# Altium PCB HEART.PcbDoc
Units mm, origin at the board's own origin, x right, y up, seen from the top; angles counter-clockwise.
Board outline 31.12 x 57.15 mm, 2 copper layers (Top Layer, Bottom Layer); 27 components, 16 nets, 63 pads, 3 vias.
Unrouted connection lines stored in the file: 13.
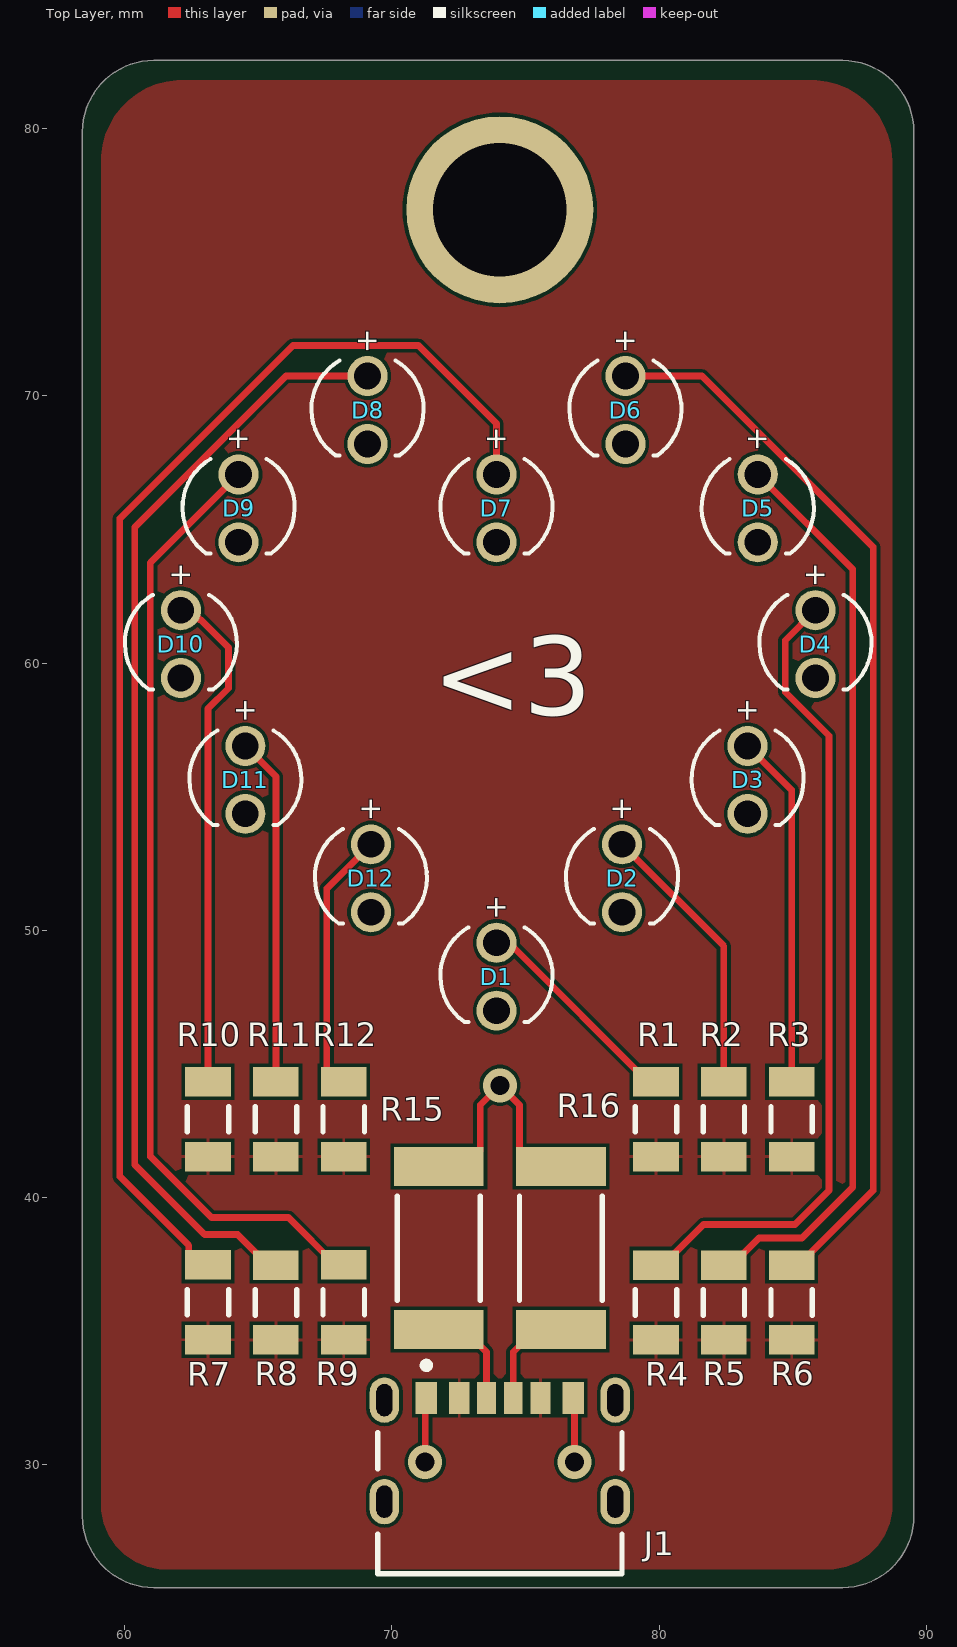
[diagram p0: Top Layer view]
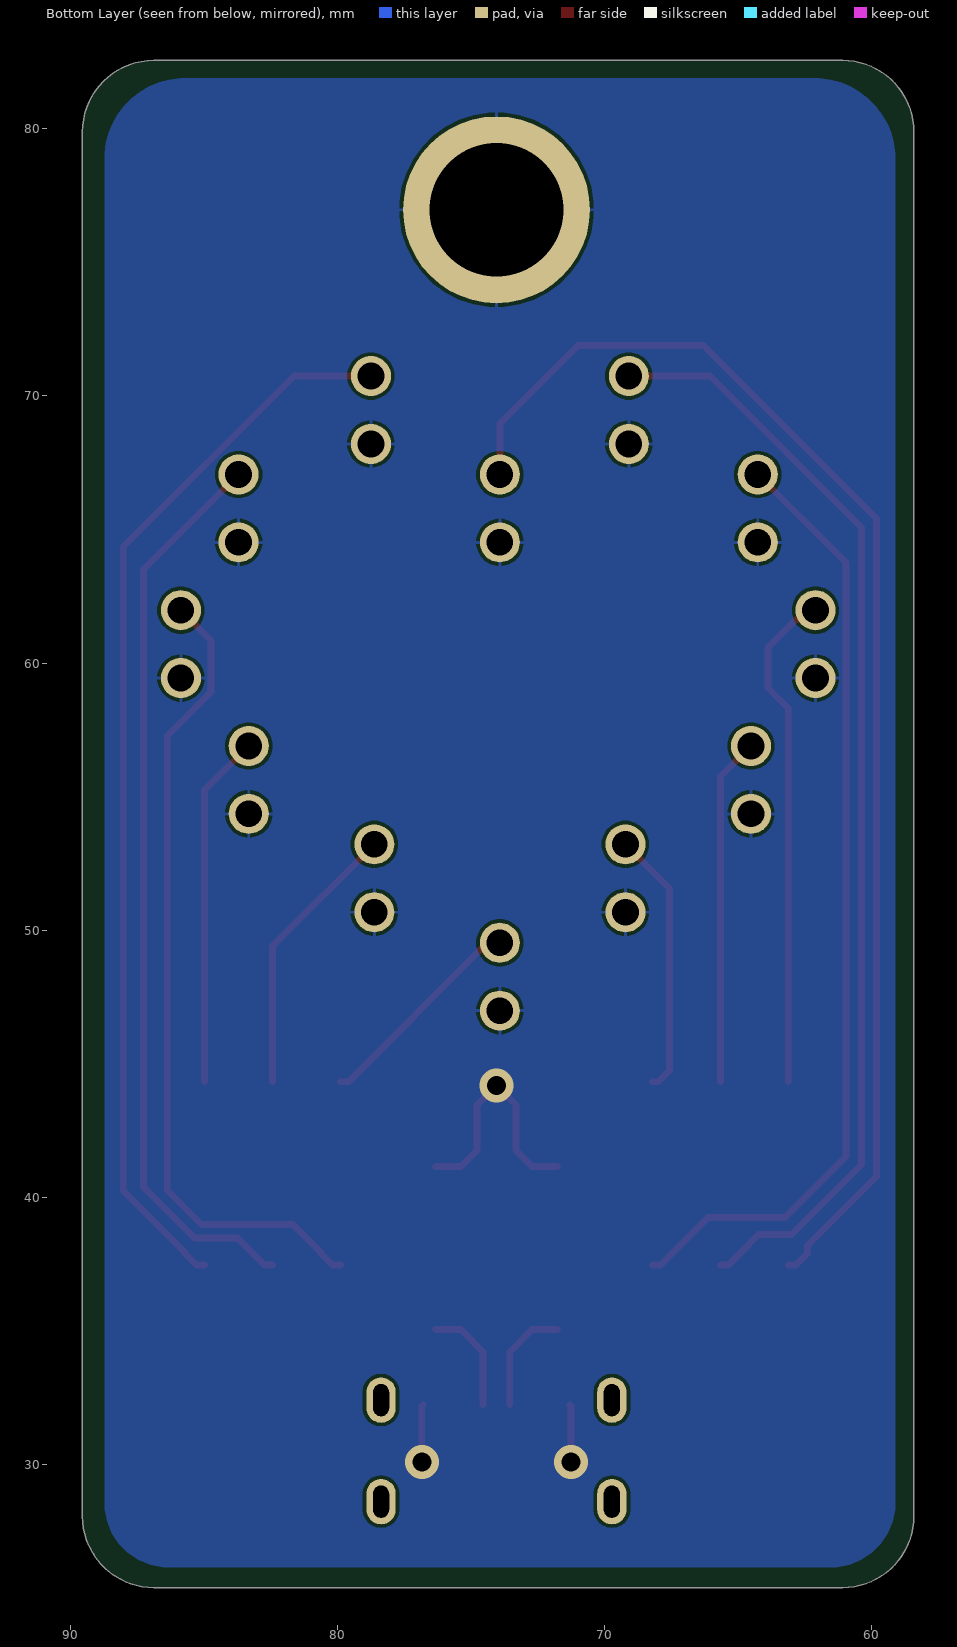
[diagram p1: Bottom Layer view, seen from below]

## Layer stack, top to bottom
Top Solder: solder mask 0.0102, Solder Resist, Dk 3.5
Top Layer: signal copper 0.0356
Dielectric 1: dielectric 0.32, FR-4, Dk 4.8
Bottom Layer: signal copper 0.0356
Bottom Solder: solder mask 0.0102, Solder Resist, Dk 3.5

## Board outline
58.42,28.067 ccw(c61.087,28.067) 61.087,25.4 86.868,25.4 ccw(c86.868,28.067) 89.535,28.067 89.535,79.883 ccw(c86.868,79.883) 86.868,82.55 61.087,82.55 ccw(c61.087,79.883) 58.42,79.883

## Design rules (kind name [scope] priority, off if disabled: settings)
BoardOutlineClearance [All] p1: gap=0.2 ignorepadtopadclearanceinfootprint=FALSE
Clearance [All] p1: gap=0.127 ignorepadtopadclearanceinfootprint=FALSE except(0.25: Arc-Hole Track-Hole SMDPad-Hole THPad-Hole Via-Hole Fill-Hole Poly-Hole Region-Hole Text-Hole)
ComponentClearance [All] p1: gap=0.127 collisioncheckmode=3 verticalgap=0.127 showdistances=TRUE
DiffPairsRouting [All] p1: maxlimit=0.254 minlimit=0.127 mostfreqgap=0.127 toplayer_minwidth=0.127 toplayer_maxwidth=25.4 toplayer_prefwidth=0.127 bottomlayer_minwidth=0.127 bottomlayer_maxwidth=25.4 bottomlayer_prefwidth=0.127 maxuncoupledlength=12.7
Height [All] p1: minheight=0 maxheight=1816.048 prefheight=12.7
HoleSize [All] p1: absolutevalues=TRUE maxlimit=6.3 minlimit=0.3 maxpercent=80.000 minpercent=20.000
HoleToHoleClearance [All] p1: gap=0.25 allowstackedmicrovias=FALSE
MinimumAnnularRing [All] p1: minimumring=0.076
MinimumSolderMaskSliver [All] p1: minsoldermaskwidth=0
PlaneClearance [All] p1: clearance=0.127
PlaneConnect PlaneConnectPowerPads [InPadClass('PowerPads')] p1: planeconnectstyle=Direct reliefexpansion=0.508 reliefentries=4 reliefconductorwidth=0.254 reliefairgap=0.254
PlaneConnect [All] p2: pad.planeconnectstyle=Relief pad.reliefexpansion=0.3 pad.reliefentries=4 pad.reliefconductorwidth=0.127 pad.reliefairgap=0.127 via.planeconnectstyle=Direct via.reliefexpansion=0.3 via.reliefentries=4 via.reliefconductorwidth=0.127 via.reliefairgap=0.127
PolygonConnect PolygonConnectPowerPads [All vs (InPadClass('PowerPads'))] p1: connectstyle=Direct reliefconductorwidth=0.254 reliefentries=4 polygonreliefangle="90 Angle" airgapwidth=0.254
PolygonConnect [All] p2: thpad.connectstyle=Relief thpad.reliefconductorwidth=0.127 thpad.reliefentries=4 thpad.polygonreliefangle="90 Angle" thpad.airgapwidth=0.127 smdpad.connectstyle=Relief smdpad.reliefconductorwidth=0.127 smdpad.reliefentries=4 smdpad.polygonreliefangle="90 Angle" smdpad.airgapwidth=0.127 via.connectstyle=Direct via.reliefconductorwidth=0.127 via.reliefentries=4 via.polygonreliefangle="90 Angle" via.airgapwidth=0.127
RoutingVias [All] p1: holewidth=0.3 width=0.6 viastyle="Through Hole" minholewidth=0.3 minwidth=0.6 maxholewidth=0.6 maxwidth=6.6
SilkToSilkClearance [All] p1: silktosilkclearance=0
SilkToSolderMaskClearance [IsPad] p1: minsilkscreentomaskgap=0.127 clearancetoexposedcopper=TRUE
SolderMaskExpansion [All] p1: expansion=0.075 istentingtop=FALSE
SupplyNets "Schematic Supply Nets_1" [InNet('+5V')] p1: voltage=0.000
SupplyNets "Schematic Supply Nets" [InNet('GND')] p2: voltage=0.000
Width [All] p1: maxlimit=25.4 minlimit=0.127 preferedwidth=0.127 minimp=50.000000 maximp=50.000000 favimp=50.000000
20 further rules are at their usual default settings.

## Components (designator, comment, footprint, x,y, rotation, side; value= is the part's Value field where it differs from the comment)
D1 "LED" WL-TMRC_D3.95H5.3 1343.914,-1221.74 r270 top
D2 "LED" WL-TMRC_D3.95H5.3 1348.613,-1218.057 r270 top
D3 "LED" WL-TMRC_D3.95H5.3 1353.312,-1214.374 r270 top
D4 "LED" WL-TMRC_D3.95H5.3 1355.852,-1209.294 r270 top
D5 "LED" WL-TMRC_D3.95H5.3 1353.693,-1204.214 r270 top
D6 "LED" WL-TMRC_D3.95H5.3 1348.74,-1200.531 r270 top
D7 "LED" WL-TMRC_D3.95H5.3 1343.914,-1204.214 r270 top
D8 "LED" WL-TMRC_D3.95H5.3 1339.088,-1200.531 r270 top
D9 "LED" WL-TMRC_D3.95H5.3 1334.262,-1204.214 r270 top
D10 "LED" WL-TMRC_D3.95H5.3 1332.103,-1209.294 r270 top
D11 "LED" WL-TMRC_D3.95H5.3 1334.516,-1214.374 r270 top
D12 "LED" WL-TMRC_D3.95H5.3 1339.215,-1218.057 r270 top
J1 "217175-0001" FP-217175-0001-MFG 74.041,29.464 r0 top
R1 "250" FP-TFCR1206-IPC_B 79.883,42.926 r270 top
R2 "250" FP-TFCR1206-IPC_B 82.423,42.926 r270 top
R3 "250" FP-TFCR1206-IPC_B 84.963,42.926 r270 top
R4 "250" FP-TFCR1206-IPC_B 79.883,36.068 r270 top
R5 "250" FP-TFCR1206-IPC_B 82.423,36.068 r270 top
R6 "250" FP-TFCR1206-IPC_B 84.963,36.068 r270 top
R7 "250" FP-TFCR1206-IPC_B 63.119,36.072 r270 top
R8 "250" FP-TFCR1206-IPC_B 65.659,36.068 r270 top
R9 "250" FP-TFCR1206-IPC_B 68.199,36.072 r270 top
R10 "250" FP-TFCR1206-IPC_B 63.119,42.926 r270 top
R11 "250" FP-TFCR1206-IPC_B 65.659,42.926 r270 top
R12 "250" FP-TFCR1206-IPC_B 68.199,42.926 r270 top
R15 "5.1k" FP-TFCR2512-IPC_A 71.755,38.103 r90 top
R16 "5.1k" FP-TFCR2512-IPC_A 76.327,38.103 r90 top

## Footprints (in the part's own frame and the unit in brackets; to place one, negate y for a bottom-side part, rotate by r counter-clockwise, add the part's x,y. Pads: shape width x height; smd on the part's side, far side on the other; paste and mask are expansions set on the pad)
FP-217175-0001-MFG [mm]
  rrect100% 1.1x1.7 hole 1.2 slot 0.6 at 0 deg paste-2539.97 mask+0: 1(-4.32,2.95) 2(4.32,2.95) 3(-4.32,-0.85) 4(4.32,-0.85)
  rect 0.7x1.2 smd paste+0 mask+0: A5(-0.5,3.03) B5(0.5,3.03)
  rect 0.76x1.2 smd paste+0 mask+0: A9(1.52,3.03) B9(-1.52,3.03)
  rect 0.8x1.2 smd paste+0 mask+0: A12(2.75,3.03) B12(-2.75,3.03)
  silkscreen extent -4.57,-3.55 4.57,4.37, body extent -4.97,-3.65 4.97,3.9, height 0.25
FP-TFCR1206-IPC_B [mm]
  rect 1.106x1.708 smd paste+0 mask+0: 1(-1.401,0) 2(1.401,0)
  silkscreen extent -0.47,-0.77 0.47,0.77, body extent -2.2,-1.1 2.2,1.1, height 0.25
FP-TFCR2512-IPC_A [mm]
  rect 1.456x3.358 smd paste+0 mask+0: 1(-3.051,0) 2(3.051,0)
  silkscreen extent -1.95,-1.55 1.95,1.55, body extent -4.28,-2.18 4.28,2.18, height 0.25
WL-TMRC_D3.95H5.3 [mm] "THT Mono-color Round Color LED, 2-leads"
  round 1.5 hole 1: 1(-1271.27,-1270) 2(-1268.73,-1270)
  silkscreen extent -1271.85,-1272.1 -1268.31,-1267.9, body extent -1271.99,-1271.97 -1268.37,-1268.03, height 5.35

## Part data
D1 D2 D3 D4 D5 D6 D7 D8 D9 D10 D11 D12: library part CMP-1488-00002-2, Case/Package=Radial, Color=Red, Forward Current=100mA, Forward Voltage=2.2V, Max Operating Temperature=85°C, Max Reverse Voltage (DC)=5V, Min Operating Temperature=-40°C, Test Current=20mA, Dominant Wavelength=640nm, Height=5.3mm, Length=3mm, Lens Size=3mm, Lens Style="Circular, Diffused, Round", Luminous Intensity=35mcd, Mount="Through Hole", NexarPartId=29717803, Packaging=Bulk, Peak Wavelength=650nm, REACH SVHC=Unknown, RoHS=Compliant, Viewing Angle=60°, Wavelength=630nm, Width=3mm
J1: library part CMP-04767-000026-1, "CONN RCP USB2.0 C 6+18P SMD RA"
R1 R2 R3 R4 R5 R6 R7 R8 R9 R10 R11 R12: library part CMP-250906-243926-1, "RES Thin Film, 100Ω, 0.1%, 0.125W, 25ppm/°C, 1206"
R15 R16: library part CMP-250906-200568-1, "RES Thin Film, 5.1kΩ, 0.5%, 0.5W, 25ppm/°C, 2512"

## Free pads (board coordinates)
  round 7 hole 5: 3(74.041,76.962)

## Via types
v1: diameter 1.27, hole 0.711, Top Layer to Bottom Layer, 3 vias

## Nets (pads, with @x,y where several pads share a name; then routed paths per layer and width w, separated by ;. In a path a pad name is that pad's centre, name@x,y a point inside that pad or via, vN(x,y) a via of type N, cw(c..) or ccw(c..) an arc to the next point about the centre after c; other vN are vias at no path point)
+5V: J1.A9 J1.B9 R1.2 R2.2 R3.2 R4.2 R5.2 R6.2 R7.2 R8.2 R9.2 R10.2 R11.2 R12.2
GND: D1.2 D2.2 D3.2 D4.2 D5.2 D6.2 D7.2 D8.2 D9.2 D10.2 D11.2 D12.2 J1.A12 J1.B12 pad.3 R15.2 R16.2 | length 13.4
  Top Layer w0.254: v1(71.247,30.099) 71.247,32.196 J1.B12@71.291,32.24 ; R15.2 72.706,41.154 73.307,41.755 73.307,43.462 v1(74.041,44.196) 74.775,43.462 74.775,41.755 75.376,41.154 R16.2 ; J1.A12@76.791,32.24 76.835,32.196 v1(76.835,30.099)
NetD1_1: D1.1 R1.1 | length 8.1
  Top Layer w0.254: D1.1 74.152,49.292 74.617,49.292 79.582,44.327 R1.1
NetD2_1: D2.1 R2.1 | length 10.5
  Top Layer w0.254: D2.1 82.423,49.403 R2.1
NetD3_1: D3.1 R3.1 | length 13.3
  Top Layer w0.254: D3.1 84.963,55.245 R3.1
NetD4_1: D4.1 R4.1 | length 30.5
  Top Layer w0.254: R4.1 80.184,37.469 80.61,37.895 80.61,37.938 81.661,38.989 85.09,38.989 86.36,40.259 86.36,57.277 84.721,58.916 84.721,60.845 D4.1
NetD5_1: D5.1 R5.1 | length 34.2
  Top Layer w0.254: R5.1 82.724,37.469 83.736,38.481 85.344,38.481 87.249,40.386 87.249,63.5 D5.1
NetD6_1: D6.1 R6.1 | length 40.2
  Top Layer w0.254: D6.1 81.609,70.739 88.011,64.337 88.011,40.259 85.69,37.938 85.69,37.895 85.264,37.469 R6.1
NetD7_1: D7.1 R7.1 | length 49.4
  Top Layer w0.254: R7.1 62.826,37.473 62.4,37.899 62.4,38.192 59.817,40.775 59.817,65.405 66.294,71.882 70.993,71.882 73.914,68.961 D7.1
NetD8_1: D8.1 R8.1 | length 41.8
  Top Layer w0.254: R8.1 65.358,37.469 64.932,37.895 64.932,37.903 64.228,38.607 62.993,38.607 60.375,41.225 60.375,65.074 66.04,70.739 D8.1
NetD9_1: D9.1 R9.1 | length 35.8
  Top Layer w0.254: D9.1 60.96,63.754 60.96,41.529 63.246,39.243 66.128,39.243 67.898,37.473 R9.1
NetD10_1: D10.1 R10.1 | length 18.9
  Top Layer w0.254: D10.1 62.44,61.976 62.795,61.621 62.839,61.621 63.881,60.579 63.881,59.055 63.119,58.293 R10.1
NetD11_1: D11.1 R11.1 | length 13
  Top Layer w0.254: D11.1 65.659,55.753 R11.1
NetD12_1: D12.1 R12.1 | length 10
  Top Layer w0.254: R12.1 67.99,44.327 67.564,44.753 67.564,51.562 D12.1
NetJ1_A5: J1.A5 R15.1 | length 4.1
  Top Layer w0.254: R15.1 72.706,35.052 73.541,34.217 J1.A5@73.541,32.24
NetJ1_B5: J1.B5 R16.1 | length 4.1
  Top Layer w0.254: J1.B5@74.541,32.24 74.541,34.217 75.376,35.052 R16.1
pads on no net: J1.1 J1.2 J1.3 J1.4

## Polygon pours and split planes (outlines as drawn)
GND on Bottom Layer "NONET_L-01_P-001" (solid, remove dead copper, pour order 2): 59.118,78.867 cw(c62.135,78.867) 62.135,81.883 85.693,81.883 cw(c85.693,78.867) 88.709,78.867 88.709,28.575 cw(c86.297,28.575) 86.296,26.162 61.531,26.162 cw(c61.531,28.575) 59.118,28.575
+5V on Top Layer "NONET_L-01_P-001" (solid, remove dead copper, pour order 0): 59.127,78.795 cw(c62.143,78.795) 62.143,81.812 85.701,81.812 cw(c85.701,78.795) 88.718,78.795 88.718,28.508 cw(c86.305,28.503) 86.305,26.09 61.54,26.09 cw(c61.54,28.503) 59.127,28.503

## Silkscreen, mask and mechanical layers (free items; w line width, h text height)
Top Overlay:
  text "<3" at 71.501,57.079 h5.08
Mechanical 1:
  lines w0.254: 58.42,28.067 ccw(c61.087,28.067) 61.087,25.4 86.868,25.4 ccw(c86.868,28.067) 89.535,28.067 89.535,79.883 ccw(c86.868,79.883) 86.868,82.55 61.022,82.55 ccw(c61.022,79.948) 58.42,79.948 58.42,28.067

## Text inside footprints (layer, text, board x,y; h text height)
D1: Top Overlay "+" at 73.564,51.31 h0.8 r270
D2: Top Overlay "+" at 78.263,54.993 h0.8 r270
D3: Top Overlay "+" at 82.962,58.676 h0.8 r270
D4: Top Overlay "+" at 85.502,63.756 h0.8 r270
D5: Top Overlay "+" at 83.343,68.836 h0.8 r270
D6: Top Overlay "+" at 78.39,72.519 h0.8 r270
D7: Top Overlay "+" at 73.564,68.836 h0.8 r270
D8: Top Overlay "+" at 68.738,72.519 h0.8 r270
D9: Top Overlay "+" at 63.912,68.836 h0.8 r270
D10: Top Overlay "+" at 61.753,63.756 h0.8 r270
D11: Top Overlay "+" at 64.166,58.676 h0.8 r270
D12: Top Overlay "+" at 68.865,54.993 h0.8 r270